# Altium PCB Candunio.PcbDoc (part 1 of 2)
Units mm, origin at the board's own origin, x right, y up, seen from the top; angles counter-clockwise.
Board outline 46 x 46 mm, 2 copper layers (Top Layer, Bottom Layer); 50 components, 55 nets, 199 pads, 108 vias.
Unrouted connection lines stored in the file: 10.
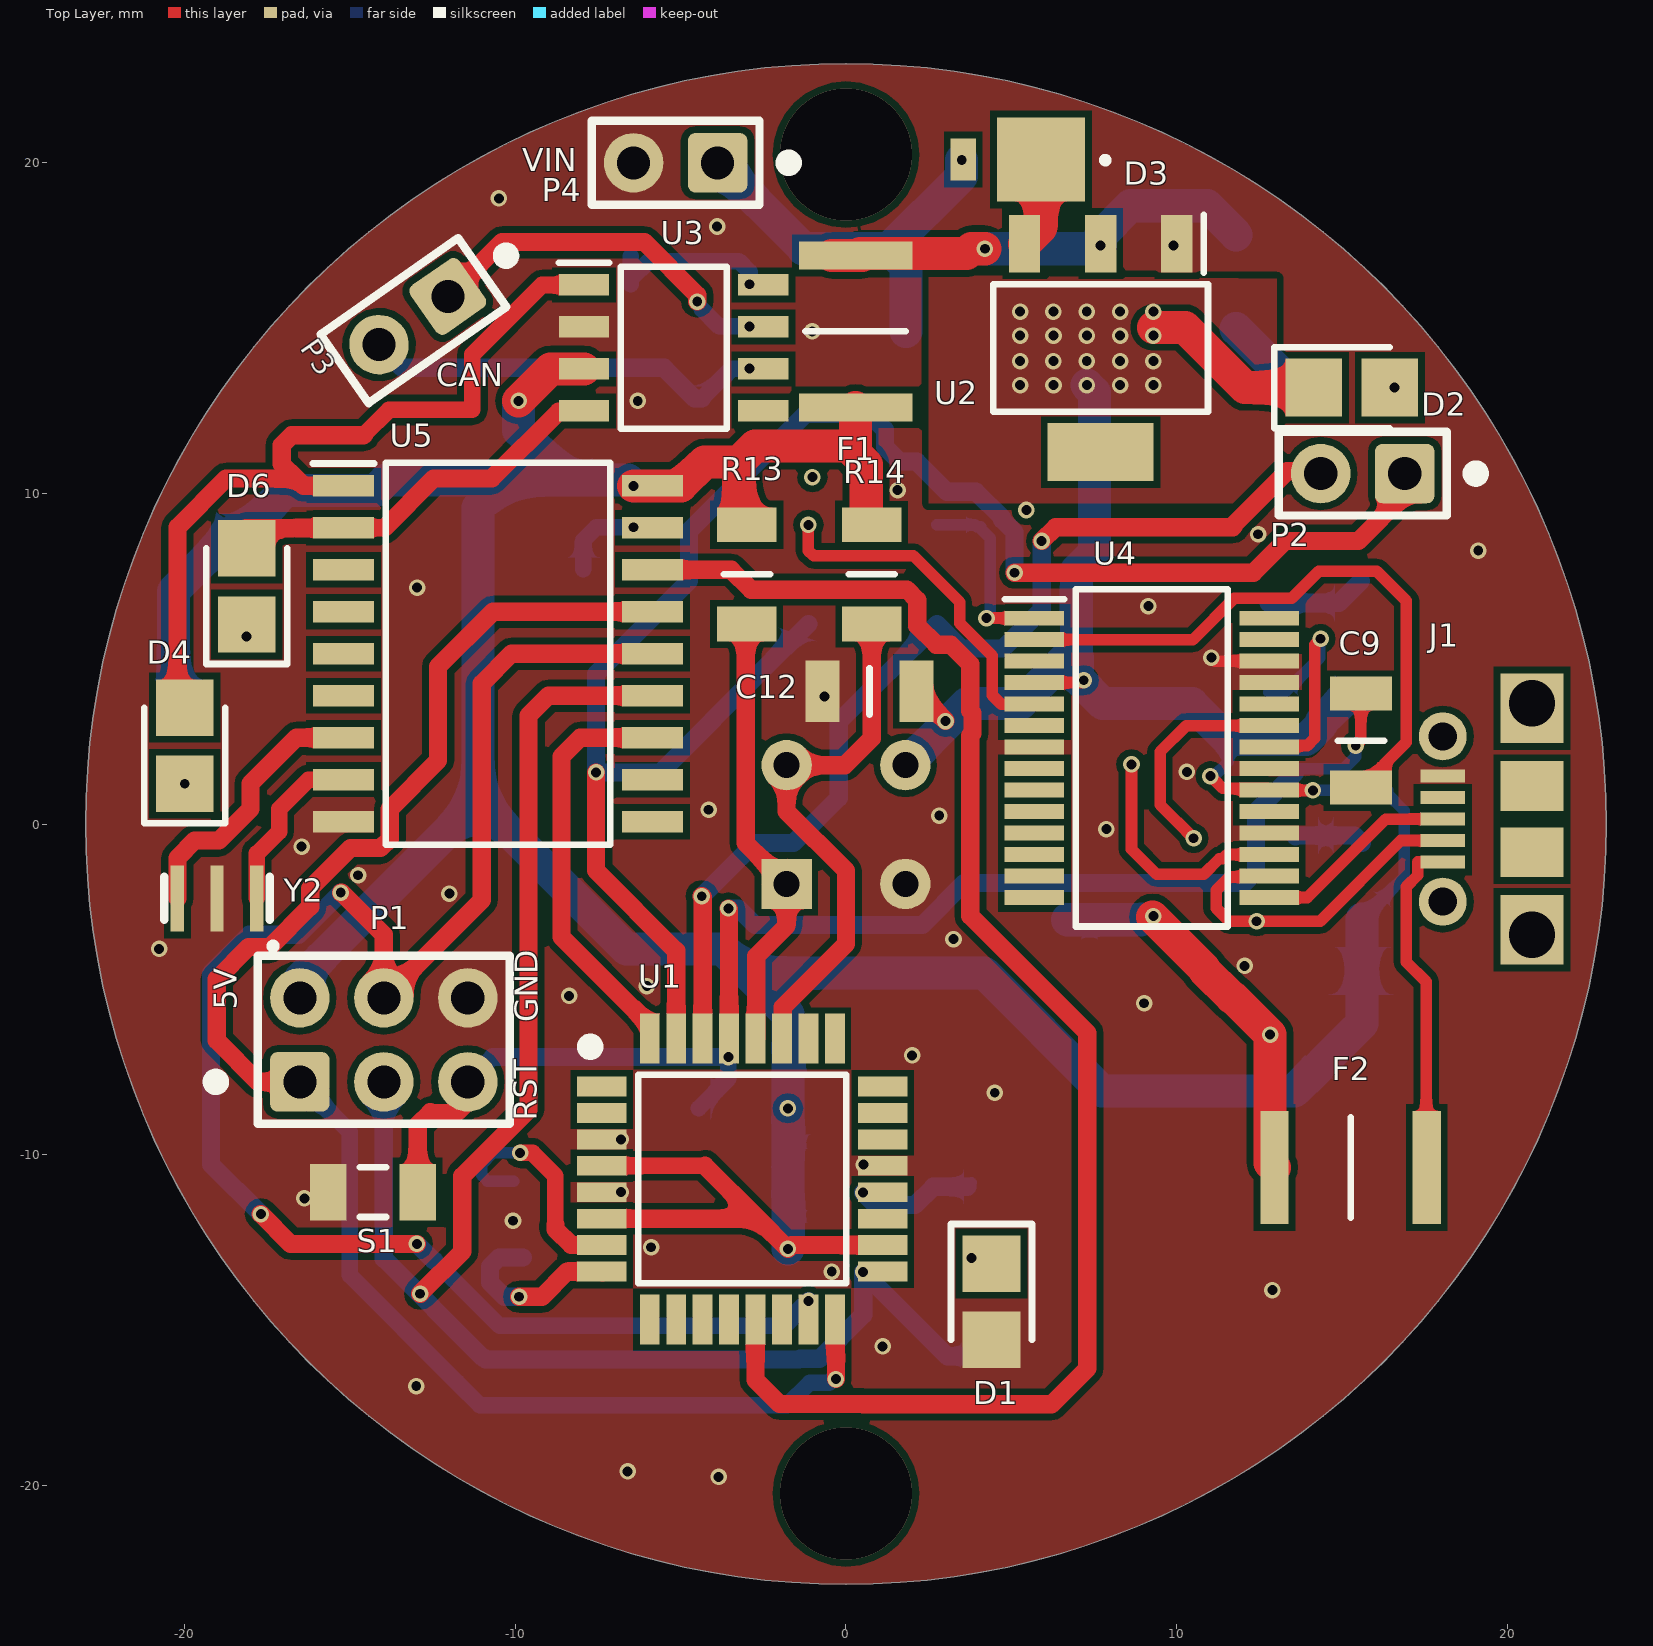
[diagram p0: Top Layer view]
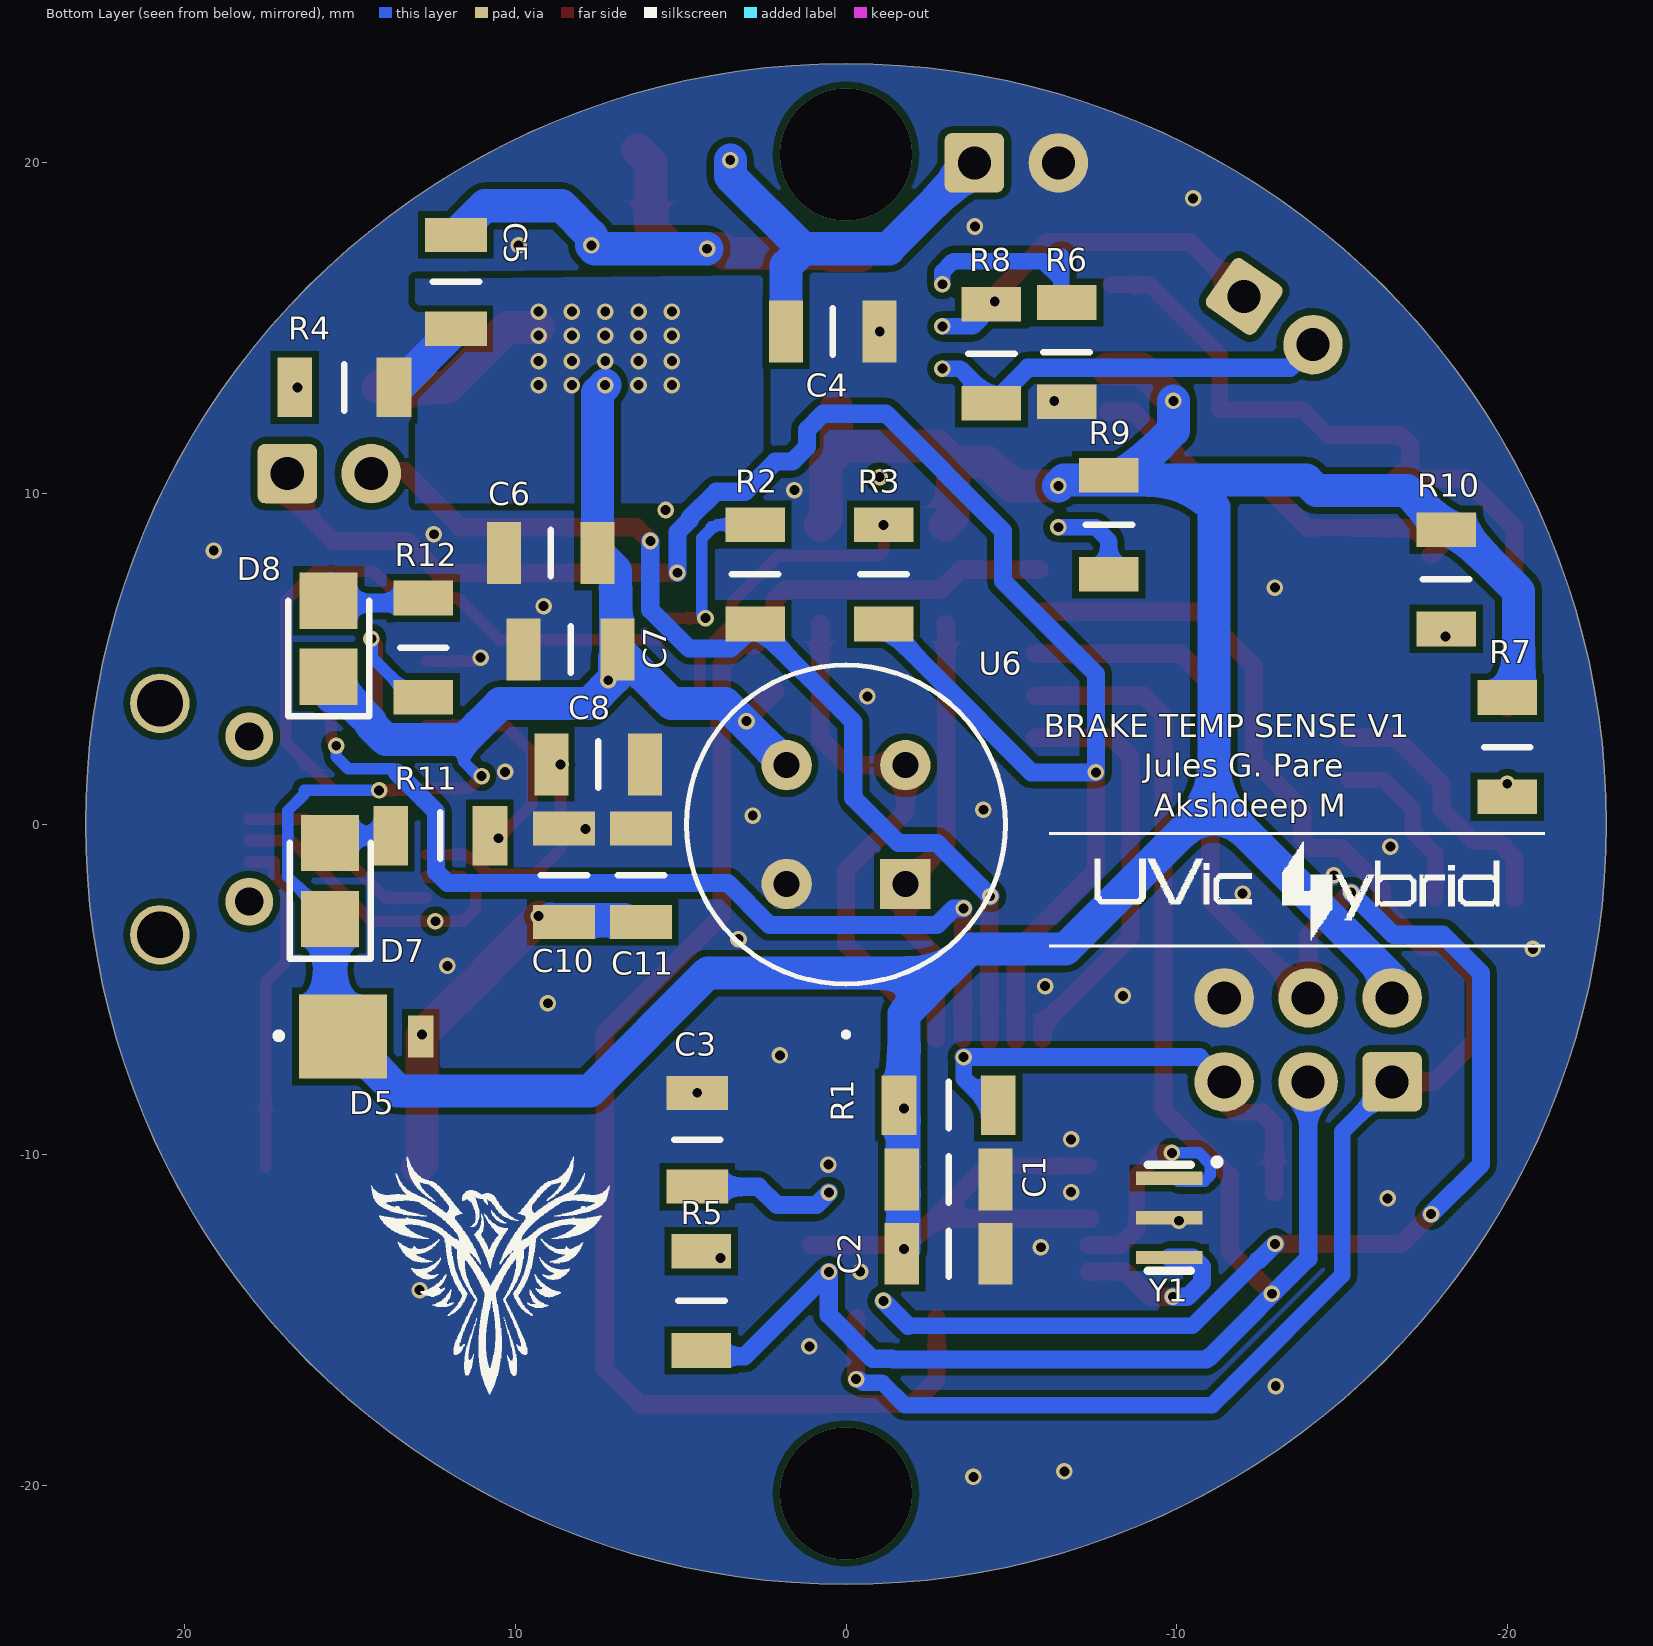
[diagram p1: Bottom Layer view, seen from below]

## Layer stack, top to bottom
Top Solder: solder mask 0.0102, Solder Resist, Dk 3.5
Top Layer: signal copper 0.0356
Dielectric 1: dielectric 0.32, FR-4, Dk 4.8
Bottom Layer: signal copper 0.0356
Bottom Solder: solder mask 0.0102, Solder Resist, Dk 3.5

## Board outline
-23,0 cw(c0,0) 0,23 cw(c0,0) 23,0 cw(c0,0) 0,-23 cw(c0,0) -23,0

## Design rules (kind name [scope] priority, off if disabled: settings)
Clearance [All] p1: gap=0.2 ignorepadtopadclearanceinfootprint=FALSE
MinimumSolderMaskSliver [All] p1: minsoldermaskwidth=0.07
PlaneConnect [All] p1: planeconnectstyle=Direct reliefexpansion=0.508 reliefentries=4 reliefconductorwidth=0.254 reliefairgap=0.254
PolygonConnect [All] p1: connectstyle=Direct reliefconductorwidth=0.254 reliefentries=4 polygonreliefangle="90 Angle" airgapwidth=0.254
RoutingVias [All] p1: holewidth=0.3 width=0.5 viastyle="Through Hole" minholewidth=0.3 minwidth=0.5 maxholewidth=0.3 maxwidth=0.5 viatemplateguid#1={90343F38-2971-4EF3-9687-2982C2C73AA6} viatemplatename#1=v50h30
SilkToSilkClearance [All] p1: silktosilkclearance=0.07
SilkToSolderMaskClearance [IsPad] p1: minsilkscreentomaskgap=0.07 clearancetoexposedcopper=TRUE
SolderMaskExpansion [All] p1: expansion=0
Width [All] p1: maxlimit=1 minlimit=0.35 preferedwidth=0.55
26 further rules are at their usual default settings.

## Classes and differential pairs
component class Candunio: C1 C2 C3 C4 C5 C6 C7 C8 C9 C10 C11 D1 D2 D3 D4 D5 D6 D7 D8 F1 F2 J1 P1 P2 P3 P4 R1 R2 R3 R4 R5 R6 R7 R8 R9 R10 R11 R12 S1 U1 U2 U3 U4 U5 Y1 Y2
component class BrakeTemp: C12 R13 R14 U6 U?

## Components (designator, comment, footprint, x,y, rotation, side; value= is the part's Value field where it differs from the comment)
C1 "Cap Pol3" CAPC3216X170N -3.106,-10.75 r180 bottom value=4.7uF
C2 "1uF" CAPC3216X170N -3.106,-13 r180 bottom
C3 "Cap Semi" CAPC3216X170N 4.5,-9.55 r90 bottom value=100nF
C4 "Cap Pol3" CAPC3216X170N 0.4,14.9 r180 bottom value=4.7uF
C5 "1uF" CAPC3216X170N 11.8,16.4 r90 bottom
C6 "Cap Pol3" CAPC3216X170N 8.931,8.2 r0 bottom value=4.7uF
C7 "Cap Semi" CAPC3216X170N 8.331,5.275 r0 bottom value=100nF
C8 "Cap Semi" CAPC3216X170N 7.493,1.803 r180 bottom value=100nF
C9 "Cap Semi" CAPC3216X170N 15.575,2.523 r270 top value=100nF
C10 "Cap Pol3" CAPC3216X170N 8.525,-1.55 r90 bottom value=4.7uF
C11 "1uF" CAPC3216X170N 6.198,-1.549 r90 bottom
C12 "0.1uF" CAPC3216X170N 0.711,4.013 r0 top
D1 "Red" LEDC3216X120NRED 4.4,-14.45 r270 top
D2 "Green" LEDC3216X120NGRN 15.3,13.2 r0 top
D3 "Diode" DO-220AA 5.2,20.1 r180 top
D4 "Yellow" LEDC3216X120NYEL -20,2.367 r90 top
D5 "Diode" DO-220AA 14.516,-6.426 r180 bottom
D6 "Yellow" LEDC3216X120NYEL -18.128,7.188 r90 top
D7 "Yellow" LEDC3216X120NYEL 15.605,-1.725 r90 bottom
D8 "Yellow" LEDC3216X120NYEL 15.65,5.604 r90 bottom
F1 "Fuse 1" FUSC4632X85N 0.29,14.9 r270 top
F2 "Fuse 2" FUSC4632X85N 15.265,-10.389 r0 top
J1 "USB micro B" 1050170001 20.75,0.15 r90 top
P1 "ICSP" "Pin Header 2x3 TH Pitch 2.54mm" -16.521,-5.26 r0 top
P2 "Serial" "Pin Header 1x2 TH Pitch 2.54mm" 16.9,10.6 r180 top
P3 "CANOUT" "Pin Header 1x2 TH Pitch 2.54mm" -12.044,15.957 r215 top
P4 "POWER" "Pin Header 1x2 TH Pitch 2.54mm" -3.885,20 r180 top
R1 "10K" RESC3216X60N -3.106,-8.5 r180 bottom
R2 "1K" RESC3216X60N 2.75,7.549 r90 bottom
R3 "1K" RESC3216X60N -1.137,7.549 r90 bottom
R4 "1K" RESC3216X60N 15.175,13.205 r180 bottom
R5 "1K" RESC3216X60N 4.375,-14.425 r270 bottom
R6 "16.9K" RESC3216X60N -6.675,14.275 r90 bottom
R7 "1K" RESC3216X60N -20,2.325 r270 bottom
R8 "120" RESC3216X60N -4.4,14.225 r270 bottom
R9 "10K" RESC3216X60N -7.95,9.05 r90 bottom
R10 "1K" RESC3216X60N -18.153,7.4 r90 bottom
R11 "1K" RESC3216X60N 12.27,-0.35 r0 bottom
R12 "1K" RESC3216X60N 12.787,5.333 r90 bottom
R13 "10K" RESC3216X60N -3,7.549 r90 top
R14 "10K" RESC3216X60N 0.78,7.549 r90 top
S1 "SW-PB" C1206 -14.306,-11.138 r180 top
U1 "ATmega328P-AU" QFP80P900X900X120-32N -3.137,-10.738 r0 top
U2 "LM1117IMPX-5.0" SOT230P700X180-4N 7.7,14.4 r270 top
U3 "MCP2551-E/SN" SOIC127P600X175-8N -5.213,14.4 r0 top
U4 "FT232RL-Reel" SOP65P780X200-28N 9.25,2 r0 top
U5 "MCP2515-E/ST" SOIC127P1030X265-18N -10.525,5.15 r0 top
U6 "MLX90614" H_08_1 0,2.523 r180 bottom value=Value
Y1 "CSTCE16M0V53-R0" CSTCE_G -9.779,-11.913 r90 bottom
Y2 "CSTCE16M0V53-R0" CSTCE_G -19.025,-2.25 r0 top

## Footprints (in the part's own frame and the unit in brackets; to place one, negate y for a bottom-side part, rotate by r counter-clockwise, add the part's x,y. Pads: shape width x height; smd on the part's side, far side on the other; paste and mask are expansions set on the pad)
1050170001 [mm] "CONN USB MICRO MOLEX MODIFIED FOR DRILL HITS"
  round 1.8 hole 1.4: 0(-3.5,0) 0(3.5,0)
  rect 2.1x1.9 smd: 0(-3.35,0) 0(3.35,0)
  round 1.45 hole 0.85: 0(-2.5,2.7) 0(2.5,2.7)
  rect 1.5x1.9 smd: 0(-1,0) 0(1,0)
  rect 0.4x1.35 smd: 1(-1.3,2.7) 2(-0.65,2.7) 3(0,2.7) 4(0.65,2.7) 5(1.3,2.7)
  body extent -4.1,-2.5 4.1,2.9, height 2.78
C1206 [mm] "Chip Capacitor, Body 3.2x1.6mm, IPC High Density"
  rect 1.1x1.7 smd: 1(-1.35,0) 2(1.35,0)
  silkscreen extent -0.4,-0.75 0.4,0.75, body extent -1.7,-0.9 1.7,0.9, height 1.3
CAPC3216X170N [mm]
  rect 1.03x1.87 smd: 1(-1.42,0) 2(1.42,0)
  silkscreen extent 0,-0.7 0,0.7, body extent -1.6,-0.8 1.6,0.8, height 1.7
CSTCE_G [mm]
  rect 0.4x2 smd: 1(1.2,0) 2(0,0) 3(-1.2,0)
  silkscreen extent -1.6,-1.52 1.77,0.65, body extent -1.6,-0.65 1.6,0.65, height 0.7
DO-220AA [mil]
  rect 105.12x100 smd: 1(-27.5,0)
  rect 30x50 smd: 2(65.06,0)
  silkscreen extent -107,-2 -102,3, body extent -76,-40 76,40, height 39
FUSC4632X85N [mm]
  rect 0.85x3.43 smd: 1(-2.3,0) 2(2.3,0)
  silkscreen extent 0,-1.52 0,1.52, body extent -2.27,-1.62 2.28,1.62, height 0.85
H_08_1 [mil]
  rect 60x60 / inner round 60 / far side rect 60x60 hole 31 paste+0 mask+0: 1(70.71,-170.71)
  round 60 hole 31 paste+0 mask+0: 2(70.71,-29.29) 3(-70.71,-29.29) 4(-70.71,-170.71)
  silkscreen extent -190,-353 190,90, body extent -182,-311 182,83, height 159
LEDC3216X120NGRN [mm]
  rect 1.7x1.75 smd: 1(-1.15,0) 2(1.15,0)
  silkscreen extent -2.35,-1.22 1.15,1.22, body extent -1.6,-0.8 1.6,0.8, height 1.1
LEDC3216X120NRED [mm]
  rect 1.7x1.75 smd: 1(-1.15,0) 2(1.15,0)
  silkscreen extent -2.35,-1.22 1.15,1.22, body extent -1.6,-0.8 1.6,0.8, height 1.1
LEDC3216X120NYEL [mm]
  rect 1.7x1.75 smd: 1(-1.15,0) 2(1.15,0)
  silkscreen extent -2.35,-1.22 1.15,1.22, body extent -1.6,-0.8 1.6,0.8, height 1.1
"Pin Header 1x2 TH Pitch 2.54mm" [mm] "PinHeader 1x2 TH Pitch 2.54mm"
  rrect25% 1.8x1.8 hole 1: 1(0,0)
  round 1.8 hole 1: 2(2.54,0)
  silkscreen extent -2.3,-1.27 3.81,1.27, body extent -1.27,-1.27 3.81,1.27, height 9.5
"Pin Header 2x3 TH Pitch 2.54mm" [mm] "PinHeader 1x3 TH Pitch 2.54mm"
  rrect25% 1.8x1.8 hole 1: 1(0,-2.54)
  round 1.8 hole 1: 2(2.54,-2.54) 3(5.08,-2.54) 4(0,0) 5(2.54,0) 6(5.08,0)
  silkscreen extent -2.69,-3.81 6.35,1.27, body extent -1.27,-3.81 6.35,1.27, height 9.5
QFP80P900X900X120-32N [mm]
  rect 1.5x0.6 smd: 1(-4.25,2.8) 2(-4.25,2) 3(-4.25,1.2) 4(-4.25,0.4) 5(-4.25,-0.4) 6(-4.25,-1.2) 7(-4.25,-2) 8(-4.25,-2.8) 17(4.25,-2.8) 18(4.25,-2) 19(4.25,-1.2) 20(4.25,-0.4) 21(4.25,0.4) 22(4.25,1.2) 23(4.25,2) 24(4.25,2.8)
  rect 0.6x1.5 smd: 9(-2.8,-4.25) 10(-2,-4.25) 11(-1.2,-4.25) 12(-0.4,-4.25) 13(0.4,-4.25) 14(1.2,-4.25) 15(2,-4.25) 16(2.8,-4.25) 25(2.8,4.25) 26(2,4.25) 27(1.2,4.25) 28(0.4,4.25) 29(-0.4,4.25) 30(-1.2,4.25) 31(-2,4.25) 32(-2.8,4.25)
  silkscreen extent -4.8,-3.15 3.15,4.2, body extent -4.5,-4.5 4.5,4.5, height 1.2
RESC3216X60N [mm]
  rect 1.05x1.8 smd: 1(-1.5,0) 2(1.5,0)
  silkscreen extent 0,-0.7 0,0.7, body extent -1.57,-0.83 1.58,0.77, height 1.2
SOIC127P600X175-8N [mm]
  rect 1.525x0.65 smd: 1(-2.712,1.905) 2(-2.712,0.635) 3(-2.712,-0.635) 4(-2.712,-1.905) 5(2.712,-1.905) 6(2.712,-0.635) 7(2.712,0.635) 8(2.712,1.905)
  silkscreen extent -3.47,-2.45 1.6,2.58, body extent -3,-2.45 3,2.45, height 1.75
SOIC127P1030X265-18N [mm]
  rect 1.85x0.65 smd: 1(-4.675,5.08) 2(-4.675,3.81) 3(-4.675,2.54) 4(-4.675,1.27) 5(-4.675,0) 6(-4.675,-1.27) 7(-4.675,-2.54) 8(-4.675,-3.81) 9(-4.675,-5.08) 10(4.675,-5.08) 11(4.675,-3.81) 12(4.675,-2.54) 13(4.675,-1.27) 14(4.675,0) 15(4.675,1.27) 16(4.675,2.54) 17(4.675,3.81) 18(4.675,5.08)
  silkscreen extent -5.6,-5.77 3.4,5.77, body extent -5.15,-5.77 5.15,5.78, height 2.65
SOP65P780X200-28N [mm]
  rect 1.8x0.45 smd: 1(-3.55,4.225) 2(-3.55,3.575) 3(-3.55,2.925) 4(-3.55,2.275) 5(-3.55,1.625) 6(-3.55,0.975) 7(-3.55,0.325) 8(-3.55,-0.325) 9(-3.55,-0.975) 10(-3.55,-1.625) 11(-3.55,-2.275) 12(-3.55,-2.925) 13(-3.55,-3.575) 14(-3.55,-4.225) 15(3.55,-4.225) 16(3.55,-3.575) 17(3.55,-2.925) 18(3.55,-2.275) 19(3.55,-1.625) 20(3.55,-0.975) 21(3.55,-0.325) 22(3.55,0.325) 23(3.55,0.975) 24(3.55,1.625) 25(3.55,2.275) 26(3.55,2.925) 27(3.55,3.575) 28(3.55,4.225)
  silkscreen extent -4.45,-5.1 2.3,5.1, body extent -3.9,-5.1 3.9,5.1, height 2
SOT230P700X180-4N [mm]
  rect 1.75x0.95 smd: 1(-3.15,2.3) 2(-3.15,0) 3(-3.15,-2.3)
  rect 1.75x3.2 smd: 4(3.15,0)
  silkscreen extent -4.03,-3.25 1.92,3.25, body extent -3.64,-3.35 3.65,3.35, height 1.81

## Part data
C1 C4 C6 C10: "Polarized Capacitor (Surface Mount)", Capacitance=4.7uF, Case/Package=1206, Case Code (Metric)=3216, Dielectric=X7R, Manufacturer="Kyocera AVX", Manufacturer Part Number=12063C475KAT2A, Max Operating Temperature=125°C, Min Operating Temperature=-55°C, Package Quantity=1, Supplier Part Number=1276-1055-1-ND, Tolerance=10%, Voltage=25V, Case Code (Imperial)=1206, ComponentLink1Description=https://datasheet.ciiva.com/2988/cx7r-2988115.pdf, ComponentLink1URL=https://datasheet.ciiva.com/2988/cx7r-2988115.pdf, ComponentLink2Description=https://datasheet.ciiva.com/7833/84526-7833366.pdf, ComponentLink2URL=https://datasheet.ciiva.com/7833/84526-7833366.pdf, ComponentLink3Description=https://datasheet.ciiva.com/16315/cx7r-16315830.pdf, ComponentLink3URL=https://datasheet.ciiva.com/16315/cx7r-16315830.pdf, ComponentLink4Description=https://datasheet.ciiva.com/153/cx7r-153207.pdf, ComponentLink4URL=https://datasheet.ciiva.com/153/cx7r-153207.pdf, ComponentLink5Description=https://datasheet.ciiva.com/7833/84526-7833367.pdf, ComponentLink5URL=https://datasheet.ciiva.com/7833/84526-7833367.pdf, ComponentLink6Description=https://datasheet.ciiva.com/153/cx7r-153208.pdf, ComponentLink6URL=https://datasheet.ciiva.com/153/cx7r-153208.pdf, ComponentLink7Description=https://datasheet.ciiva.com/7833/cx7r-7833368.pdf, ComponentLink7URL=https://datasheet.ciiva.com/7833/cx7r-7833368.pdf, ComponentLink8Description=https://datasheet.ciiva.com/153/cx7r-153209.pdf, ComponentLink8URL=https://datasheet.ciiva.com/153/cx7r-153209.pdf, ComponentLink9Description=https://datasheet.ciiva.com/5417/cx7r-218113-5417949.pdf, ComponentLink9URL=https://datasheet.ciiva.com/5417/cx7r-218113-5417949.pdf, ComponentLink10Description=https://datasheet.ciiva.com/28611/cx7r-28611725.pdf, ComponentLink10URL=https://datasheet.ciiva.com/28611/cx7r-28611725.pdf, ComponentLink11Description=https://datasheet.ciiva.com/11786/0900766b80dc2409-11786382.pdf, ComponentLink11URL=https://datasheet.ciiva.com/11786/0900766b80dc2409-11786382.pdf, Contact Plating=Tin,Matte, Depth=1.6mm, Height=1.78mm, LatestRevisionDate=29-May-2009, LatestRevisionNote="IPC-7351 Footprint Added.", Lead Free="Lead Free", Length=3.2mm, Mount="Surface Mount", Number of Pins=2, PackageDescription="Chip Capacitor", PackageReference=C0805, Packaging="Tape and Reel", Pricing 1="1=0.5, 10=0.345, 100=0.207, 500=0.15526, 1000=0.1311 (USD)", Published=8-Jun-2000, Publisher="Altium Limited", Radiation Hardening=No, REACH SVHC="No SVHC", Stock 1=0, Supplier 1=Digi-Key, Supplier 2=Digi-Key, Termination=SMD/SMT, Thickness=0.07inch, Voltage Rating=25V, Voltage Rating (DC)=25V, Width=0.063inch
C2 C5 C11: library part "Cap Semi", "Capacitor (Semiconductor SIM Model)", Case/Package=1206, Case Code (Metric)=3216, Dielectric=X7R, Manufacturer=Murata, Manufacturer Part Number=GRM31MR71H105KA88L, Max Operating Temperature=125°C, Min Operating Temperature=-55°C, Package Quantity=1, Supplier Part Number=1276-3086-1-ND, Tolerance=10%, Voltage=50V, Capacitance=1uF, Case Code (Imperial)=1206, ComponentLink1Description=https://datasheet.ciiva.com/16379/product-16379616.pdf, ComponentLink1URL=https://datasheet.ciiva.com/16379/product-16379616.pdf, ComponentLink2Description=https://datasheet.ciiva.com/14116/nmgrm-data-en-14116709.pdf, ComponentLink2URL=https://datasheet.ciiva.com/14116/nmgrm-data-en-14116709.pdf, ComponentLink3Description=https://datasheet.ciiva.com/22703/608985-22703384.pdf, ComponentLink3URL=https://datasheet.ciiva.com/22703/608985-22703384.pdf, ComponentLink4Description=https://datasheet.ciiva.com/3777/42grm31mr71h105ka8823-3777081.pdf, ComponentLink4URL=https://datasheet.ciiva.com/3777/42grm31mr71h105ka8823-3777081.pdf, ComponentLink5Description=https://datasheet.ciiva.com/6270/partnumbering-e-01-6270398.pdf, ComponentLink5URL=https://datasheet.ciiva.com/6270/partnumbering-e-01-6270398.pdf, ComponentLink6Description=https://datasheet.ciiva.com/6270/partnumbering-e-01-6270399.pdf, ComponentLink6URL=https://datasheet.ciiva.com/6270/partnumbering-e-01-6270399.pdf, ComponentLink7Description=https://datasheet.ciiva.com/29199/455056-da-01-en-vs-kondensator-1206-29199449.pdf, ComponentLink7URL=https://datasheet.ciiva.com/29199/455056-da-01-en-vs-kondensator-1206-29199449.pdf, ComponentLink8Description=https://datasheet.ciiva.com/29202/450923-da-01-de-vs-chip-kond-1206-1-0-uf-10pr-50-0v-x7r-29202718.pdf, ComponentLink8URL=https://datasheet.ciiva.com/29202/450923-da-01-de-vs-chip-kond-1206-1-0-uf-10pr-50-0v-x7r-29202718.pdf, Depth=1.6mm, Height=1.15mm, LatestRevisionDate=29-May-2009, LatestRevisionNote="IPC-7351 Footprint Added.", Lead Free="Lead Free", Length=3.2mm, Material=Ceramic, Mount="Surface Mount", Number of Pins=2, PackageDescription="Chip Capacitor", PackageReference=C1206, Packaging="Tape and Reel", Published=8-Jun-2000, Publisher="Altium Limited", REACH SVHC="No SVHC", Stock 1=0, Supplier 1=Digi-Key, Supplier 2=Digi-Key, Termination=SMD/SMT, Thickness=0.049inch, Voltage Rating=50V, Voltage Rating (DC)=50V, Width=0.063inch
C3 C7 C8 C9: "Capacitor (Semiconductor SIM Model)", Capacitance=100nF, Case/Package=1206, Case Code (Metric)=3216, Dielectric=X7R, Dielectric Material=Ceramic, Manufacturer=Yageo, Manufacturer Part Number=CC1206KKX7R0BB104, Max Operating Temperature=125°C, Min Operating Temperature=-55°C, Package Quantity=1, Supplier Part Number=1276-1151-1-ND, Tolerance=10%, Voltage=63V, Voltage Rating=100V, Case Code (Imperial)=1206, ComponentLink1Description=https://datasheet.ciiva.com/180/mlccorderingcode-180144.pdf, ComponentLink1URL=https://datasheet.ciiva.com/180/mlccorderingcode-180144.pdf, ComponentLink2Description=https://datasheet.ciiva.com/180/mlccorderingcode-180145.pdf, ComponentLink2URL=https://datasheet.ciiva.com/180/mlccorderingcode-180145.pdf, ComponentLink3Description=https://datasheet.ciiva.com/180/mlccorderingcode-180146.pdf, ComponentLink3URL=https://datasheet.ciiva.com/180/mlccorderingcode-180146.pdf, ComponentLink4Description=https://datasheet.ciiva.com/7978/1447671-7978227.pdf, ComponentLink4URL=https://datasheet.ciiva.com/7978/1447671-7978227.pdf, ComponentLink5Description=https://datasheet.ciiva.com/5425/upy-gp-np0-16v-to-50v-8-5425573.pdf, ComponentLink5URL=https://datasheet.ciiva.com/5425/upy-gp-np0-16v-to-50v-8-5425573.pdf, ComponentLink6Description=https://datasheet.ciiva.com/26829/getdatasheetpartid-403790-26829655.pdf, ComponentLink6URL=https://datasheet.ciiva.com/26829/getdatasheetpartid-403790-26829655.pdf, ComponentLink7Description=https://datasheet.ciiva.com/46391/1919308-46391993.pdf, ComponentLink7URL=https://datasheet.ciiva.com/46391/1919308-46391993.pdf, ComponentLink8Description=https://datasheet.ciiva.com/16981/upy-np0x7r-mv-100-to-630v-9-16981180.pdf, ComponentLink8URL=https://datasheet.ciiva.com/16981/upy-np0x7r-mv-100-to-630v-9-16981180.pdf, Composition=Ceramic, Depth=1.6mm, Height=1.25mm, LatestRevisionDate=29-May-2009, LatestRevisionNote="IPC-7351 Footprint Added.", Lead Free="Lead Free", Length=3.2mm, Mount="Surface Mount", Number of Pins=2, PackageDescription="Chip Capacitor", PackageReference=C1206, Packaging="Tape and Reel", Pricing 1="1=0.32, 10=0.221, 100=0.1117, 500=0.07646, 1000=0.06763 (USD)", Published=8-Jun-2000, Publisher="Altium Limited", Radiation Hardening=No, REACH SVHC="No SVHC", Stock 1=0, Supplier 1=Digi-Key, Supplier 2=Digi-Key, Termination=SMD/SMT, Thickness=0.057inch, Voltage Rating (DC)=100V, Width=0.063inch
C12: library part "Cap Semi_1", "Capacitor (Semiconductor SIM Model)", Case/Package=1206, Case Code (Metric)=3216, Dielectric=X7R, Manufacturer=Murata, Manufacturer Part Number=GRM31MR71H105KA88L, Max Operating Temperature=125°C, Min Operating Temperature=-55°C, Package Quantity=1, Supplier Part Number=1276-2744-1-ND, Tolerance=10%, Voltage=50V, Capacitance=0.1uF, Case Code (Imperial)=1206, ComponentLink1Description=https://datasheet.ciiva.com/16379/product-16379616.pdf, ComponentLink1URL=https://datasheet.ciiva.com/16379/product-16379616.pdf, ComponentLink2Description=https://datasheet.ciiva.com/14116/nmgrm-data-en-14116709.pdf, ComponentLink2URL=https://datasheet.ciiva.com/14116/nmgrm-data-en-14116709.pdf, ComponentLink3Description=https://datasheet.ciiva.com/22703/608985-22703384.pdf, ComponentLink3URL=https://datasheet.ciiva.com/22703/608985-22703384.pdf, ComponentLink4Description=https://datasheet.ciiva.com/3777/42grm31mr71h105ka8823-3777081.pdf, ComponentLink4URL=https://datasheet.ciiva.com/3777/42grm31mr71h105ka8823-3777081.pdf, ComponentLink5Description=https://datasheet.ciiva.com/6270/partnumbering-e-01-6270398.pdf, ComponentLink5URL=https://datasheet.ciiva.com/6270/partnumbering-e-01-6270398.pdf, ComponentLink6Description=https://datasheet.ciiva.com/6270/partnumbering-e-01-6270399.pdf, ComponentLink6URL=https://datasheet.ciiva.com/6270/partnumbering-e-01-6270399.pdf, ComponentLink7Description=https://datasheet.ciiva.com/29199/455056-da-01-en-vs-kondensator-1206-29199449.pdf, ComponentLink7URL=https://datasheet.ciiva.com/29199/455056-da-01-en-vs-kondensator-1206-29199449.pdf, ComponentLink8Description=https://datasheet.ciiva.com/29202/450923-da-01-de-vs-chip-kond-1206-1-0-uf-10pr-50-0v-x7r-29202718.pdf, ComponentLink8URL=https://datasheet.ciiva.com/29202/450923-da-01-de-vs-chip-kond-1206-1-0-uf-10pr-50-0v-x7r-29202718.pdf, Depth=1.6mm, Height=1.15mm, LatestRevisionDate=29-May-2009, LatestRevisionNote="IPC-7351 Footprint Added.", Lead Free="Lead Free", Length=3.2mm, Material=Ceramic, Mount="Surface Mount", Number of Pins=2, PackageDescription="Chip Capacitor", PackageReference=C1206, Packaging="Tape and Reel", Published=8-Jun-2000, Publisher="Altium Limited", REACH SVHC="No SVHC", Stock 1=0, Supplier 1=Digi-Key, Supplier 2=Digi-Key, Termination=SMD/SMT, Thickness=0.049inch, Voltage Rating=50V, Voltage Rating (DC)=50V, Width=0.063inch
D1: library part LED2, "Typical RED, GREEN, YELLOW, AMBER GaAs LED", Case/Package=1206, Case Code (Metric)=3216, Colour=Yellow, Forward Current=20mA, Forward Voltage=2.1V, Lens Colour=White,Clear, Manufacturer="Broadcom Avago", Manufacturer Part Number=HSMY-C150, Max Operating Temperature=85°C, Max Power Dissipation=65mW, Min Operating Temperature=-40°C, Package Quantity=1, Reverse Voltage=5V, Supplier Part Number=732-4992-1-ND, Case Code (Imperial)=1206, ComponentLink1Description=https://datasheet.ciiva.com/15117/getdatasheetpartid-110528-15117488.pdf, ComponentLink1URL=https://datasheet.ciiva.com/15117/getdatasheetpartid-110528-15117488.pdf, ComponentLink2Description=https://datasheet.ciiva.com/11774/0900766b804a6539-11774578.pdf, ComponentLink2URL=https://datasheet.ciiva.com/11774/0900766b804a6539-11774578.pdf, ComponentLink3Description=https://datasheet.ciiva.com/19466/1557071-19466435.pdf, ComponentLink3URL=https://datasheet.ciiva.com/19466/1557071-19466435.pdf, ComponentLink4Description=https://datasheet.ciiva.com/14172/swseriehsmx-c150toc190-e-14172159.pdf, ComponentLink4URL=https://datasheet.ciiva.com/14172/swseriehsmx-c150toc190-e-14172159.pdf, ComponentLink5Description=https://datasheet.ciiva.com/29280/180507-da-01-en-chip-led-hsmy-c150-gelb-29280997.pdf, ComponentLink5URL=https://datasheet.ciiva.com/29280/180507-da-01-en-chip-led-hsmy-c150-gelb-29280997.pdf, ComponentLink6Description=https://datasheet.ciiva.com/11773/0900766b804a6539-11773956.pdf, ComponentLink6URL=https://datasheet.ciiva.com/11773/0900766b804a6539-11773956.pdf, ComponentLink7Description=https://datasheet.ciiva.com/15117/getdatasheetpartid-142358-15117749.pdf, ComponentLink7URL=https://datasheet.ciiva.com/15117/getdatasheetpartid-142358-15117749.pdf, ComponentLink8Description=https://datasheet.ciiva.com/46426/313031-46426533.pdf, ComponentLink8URL=https://datasheet.ciiva.com/46426/313031-46426533.pdf, ComponentLink9Description=https://datasheet.ciiva.com/14172/swseriehsmx-c150toc190-e-14172156.pdf, ComponentLink9URL=https://datasheet.ciiva.com/14172/swseriehsmx-c150toc190-e-14172156.pdf, ComponentLink10Description=https://datasheet.ciiva.com/29281/180509-da-01-en-chip-led-hsmh-c150-rot-29281009.pdf, ComponentLink10URL=https://datasheet.ciiva.com/29281/180509-da-01-en-chip-led-hsmh-c150-rot-29281009.pdf, Contact Plating=Gold, Depth=1.6mm, Dominant Wavelength=586nm, Height=1.1mm, Illumination Colour=Yellow, LatestRevisionDate=17-Jul-2002, LatestRevisionNote="Re-released for DXP Platform.", Lead Free="Lead Free", Length=3.2mm, Lens Style=Diffused,Colorless,Rectangular, Lens Transparency=Diffused, Luminous Intensity=8mcd, Mount="Surface Mount", Number of Elements=1, Number of LEDs=1, Number of Pins=2, PackageDescription="SM LED; 2 Flat Leads", PackageReference=3.2X1.6X1.1, PackageVersion=Feb-2002, Packaging="Tape and Reel", Power Dissipation=65mW, Power Rating=65mW, Published=8-Jun-2000, Publisher="Altium Limited", Radiation Hardening=No, REACH SVHC="No SVHC", Stock 1=0, Stock 2=0, Supplier 1=Digi-Key, Supplier 2=Digi-Key, Supplier 3=Digi-Key, Supplier 4=Digi-Key, Test Current=20mA, Viewing Angle=170°, Voltage Rating (DC)=2.1V, Wavelength=586nm, Width=1.6mm
D2: library part LED2, "Typical RED, GREEN, YELLOW, AMBER GaAs LED", Case/Package=1206, Case Code (Metric)=3216, Colour=Green,Yellow, Forward Current=20mA, Forward Voltage=2.2V, Lens Colour=White,Clear, Manufacturer="Broadcom Avago", Manufacturer Part Number=HSMG-C150, Max Operating Temperature=85°C, Max Power Dissipation=65mW, Min Operating Temperature=-30°C, Package Quantity=1, Reverse Voltage=5V, Supplier Part Number=732-4993-1-ND, Case Code (Imperial)=1206, ComponentLink1Description=https://datasheet.ciiva.com/11774/0900766b804a6539-11774272.pdf, ComponentLink1URL=https://datasheet.ciiva.com/11774/0900766b804a6539-11774272.pdf, ComponentLink2Description=https://datasheet.ciiva.com/14172/swseriehsmx-c150toc190-e-14172162.pdf, ComponentLink2URL=https://datasheet.ciiva.com/14172/swseriehsmx-c150toc190-e-14172162.pdf, ComponentLink3Description=https://datasheet.ciiva.com/46426/313031-46426517.pdf, ComponentLink3URL=https://datasheet.ciiva.com/46426/313031-46426517.pdf, ComponentLink4Description=https://datasheet.ciiva.com/15117/getdatasheetpartid-110366-15117482.pdf, ComponentLink4URL=https://datasheet.ciiva.com/15117/getdatasheetpartid-110366-15117482.pdf, ComponentLink5Description=https://datasheet.ciiva.com/19466/1556369-19466015.pdf, ComponentLink5URL=https://datasheet.ciiva.com/19466/1556369-19466015.pdf, ComponentLink6Description=https://datasheet.ciiva.com/29280/180668-da-01-en-chip-led-hsmg-c150-gelb-gruen-29280632.pdf, ComponentLink6URL=https://datasheet.ciiva.com/29280/180668-da-01-en-chip-led-hsmg-c150-gelb-gruen-29280632.pdf, Contact Plating=Gold, Depth=1.6mm, Dominant Wavelength=572nm, Height=1.1mm, Illumination Colour=Green, LatestRevisionDate=17-Jul-2002, LatestRevisionNote="Re-released for DXP Platform.", Length=3.2mm, Lens Style=Diffused,Colorless,Rectangular, Lens Transparency=Diffused, Luminous Intensity=15mcd, Mount="Surface Mount", Number of Elements=1, Number of LEDs=1, Number of Pins=2, PackageDescription="SM LED; 2 Flat Leads", PackageReference=3.2X1.6X1.1, PackageVersion=Feb-2002, Packaging="Tape and Reel", Power Dissipation=65mW, Power Rating=65mW, Published=8-Jun-2000, Publisher="Altium Limited", Radiation Hardening=No, REACH SVHC="No SVHC", Supplier 1=Digi-Key, Supplier 2=Digi-Key, Test Current=20mA, Viewing Angle=170°, Wavelength=572nm, Width=1.6mm
D3 D5: "Default Diode", Supplier Part Number=SS1P3L-M3/84AGICT-ND, Code_JEDEC=DO-214-AB, LatestRevisionDate=17-Jul-2002, LatestRevisionNote="Re-released for DXP Platform.", PackageDescription="DO-214-AB/SMC; 2 C-Bend Leads; Body 7.9 x 5.9 mm, inc. leads (LxW)", PackageReference=SMC, PackageVersion=Sep-1996, Published=8-Jun-2000, Publisher="Altium Limited", Supplier 1=Digi-Key, Supplier 2=Digi-Key
D4 D6 D7 D8: library part LED2, "Typical RED, GREEN, YELLOW, AMBER GaAs LED", Case/Package=1206, Case Code (Metric)=3216, Forward Current=20mA, Forward Voltage=2.1V, Lens Colour=White,Clear, Manufacturer="Broadcom Avago", Manufacturer Part Number=HSMY-C150, Max Operating Temperature=85°C, Max Power Dissipation=65mW, Min Operating Temperature=-40°C, Package Quantity=1, Reverse Voltage=5V, Supplier Part Number=732-4994-1-ND, Case Code (Imperial)=1206, Colour=Yellow, ComponentLink1Description=https://datasheet.ciiva.com/15117/getdatasheetpartid-110528-15117488.pdf, ComponentLink1URL=https://datasheet.ciiva.com/15117/getdatasheetpartid-110528-15117488.pdf, ComponentLink2Description=https://datasheet.ciiva.com/11774/0900766b804a6539-11774578.pdf, ComponentLink2URL=https://datasheet.ciiva.com/11774/0900766b804a6539-11774578.pdf, ComponentLink3Description=https://datasheet.ciiva.com/19466/1557071-19466435.pdf, ComponentLink3URL=https://datasheet.ciiva.com/19466/1557071-19466435.pdf, ComponentLink4Description=https://datasheet.ciiva.com/14172/swseriehsmx-c150toc190-e-14172159.pdf, ComponentLink4URL=https://datasheet.ciiva.com/14172/swseriehsmx-c150toc190-e-14172159.pdf, ComponentLink5Description=https://datasheet.ciiva.com/29280/180507-da-01-en-chip-led-hsmy-c150-gelb-29280997.pdf, ComponentLink5URL=https://datasheet.ciiva.com/29280/180507-da-01-en-chip-led-hsmy-c150-gelb-29280997.pdf, Contact Plating=Gold, Depth=1.6mm, Dominant Wavelength=586nm, Height=1.1mm, Illumination Colour=Yellow, LatestRevisionDate=17-Jul-2002, LatestRevisionNote="Re-released for DXP Platform.", Lead Free="Lead Free", Length=3.2mm, Lens Style=Diffused,Colorless,Rectangular, Lens Transparency=Diffused, Luminous Intensity=8mcd, Mount="Surface Mount", Number of Elements=1, Number of LEDs=1, Number of Pins=2, PackageDescription="SM LED; 2 Flat Leads", PackageReference=3.2X1.6X1.1, PackageVersion=Feb-2002, Packaging="Tape and Reel", Power Dissipation=65mW, Power Rating=65mW, Published=8-Jun-2000, Publisher="Altium Limited", Radiation Hardening=No, REACH SVHC="No SVHC", Stock 1=0, Supplier 1=Digi-Key, Supplier 2=Digi-Key, Test Current=20mA, Viewing Angle=170°, Voltage Rating (DC)=2.1V, Wavelength=586nm, Width=1.6mm
F1: library part "Fuse 2", "Fuse", Case/Package=1812, Case Code (Metric)=4532, Current Rating=100A, Hold Current=500mA, Manufacturer=Bourns, Manufacturer Part Number=MF-MSMF050-2, Max Operating Temperature=85°C, Min Operating Temperature=-40°C, Operating Supply Voltage=15V, Package Quantity=2000, Power Dissipation=800mW, Resistance=150mR, Supplier Part Number=?MF-MSMF050-2CT-ND, Trip Current=1A, Approvals=UL,CSA,TUV, Case Code (Imperial)=1812, ComponentLink1Description=https://datasheet.ciiva.com/326/mfmsmf-326354.pdf, ComponentLink1URL=https://datasheet.ciiva.com/326/mfmsmf-326354.pdf, ComponentLink2Description=https://datasheet.ciiva.com/1228/1786007-1228155.pdf, ComponentLink2URL=https://datasheet.ciiva.com/1228/1786007-1228155.pdf, ComponentLink3Description=https://datasheet.ciiva.com/16205/mfmsmf-16205994.pdf, ComponentLink3URL=https://datasheet.ciiva.com/16205/mfmsmf-16205994.pdf, ComponentLink4Description=https://datasheet.ciiva.com/34302/1164200-34302041.pdf, ComponentLink4URL=https://datasheet.ciiva.com/34302/1164200-34302041.pdf, ComponentLink5Description=https://datasheet.ciiva.com/14537/70153434-14537737.pdf, ComponentLink5URL=https://datasheet.ciiva.com/14537/70153434-14537737.pdf, ComponentLink6Description=https://datasheet.ciiva.com/46395/1695373-46395287.pdf, ComponentLink6URL=https://datasheet.ciiva.com/46395/1695373-46395287.pdf, ComponentLink7Description=https://datasheet.ciiva.com/22749/1695373-22749079.pdf, ComponentLink7URL=https://datasheet.ciiva.com/22749/1695373-22749079.pdf, ComponentLink8Description=https://datasheet.ciiva.com/32426/mf-msmf-series-eng-tds-32426126.pdf, ComponentLink8URL=https://datasheet.ciiva.com/32426/mf-msmf-series-eng-tds-32426126.pdf, ComponentLink9Description=https://datasheet.ciiva.com/4501/mfmsmf-72300-4501655.pdf, ComponentLink9URL=https://datasheet.ciiva.com/4501/mfmsmf-72300-4501655.pdf, ComponentLink10Description=https://datasheet.ciiva.com/3019/mfmsmf-3019622.pdf, ComponentLink10URL=https://datasheet.ciiva.com/3019/mfmsmf-3019622.pdf, ComponentLink11Description=https://datasheet.ciiva.com/3019/mfmsmf-3019621.pdf, ComponentLink11URL=https://datasheet.ciiva.com/3019/mfmsmf-3019621.pdf, ComponentLink12Description=https://datasheet.ciiva.com/326/mfmsmf-326356.pdf, ComponentLink12URL=https://datasheet.ciiva.com/326/mfmsmf-326356.pdf, ComponentLink13Description=https://datasheet.ciiva.com/1274/1786007-1274499.pdf, ComponentLink13URL=https://datasheet.ciiva.com/1274/1786007-1274499.pdf, ComponentLink14Description=https://datasheet.ciiva.com/326/mfmsmf-326355.pdf, ComponentLink14URL=https://datasheet.ciiva.com/326/mfmsmf-326355.pdf, ComponentLink15Description=https://datasheet.ciiva.com/1274/1786007-1274498.pdf, ComponentLink15URL=https://datasheet.ciiva.com/1274/1786007-1274498.pdf, ComponentLink16Description=https://datasheet.ciiva.com/15226/getdatasheetpartid-117168-15226886.pdf, ComponentLink16URL=https://datasheet.ciiva.com/15226/getdatasheetpartid-117168-15226886.pdf, ComponentLink17Description=https://datasheet.ciiva.com/25894/mfmsmf-25894175.pdf, ComponentLink17URL=https://datasheet.ciiva.com/25894/mfmsmf-25894175.pdf, Contact Plating=Gold, Height=0.85mm, LatestRevisionDate=17-Jul-2002, LatestRevisionNote="Re-released for DXP Platform.", Lead Free="Lead Free", Length=4.73mm, Max Current Rating=100A, Mount="Surface Mount,PCB", Number of Terminals=2, PackageDescription="Thru-Hole; 2 Leads", PackageReference=PIN-W2/E2.8, Packaging="Tape and Reel", Part number=MF-MSMF050-2, Pricing 1="2000=0.2898, 4000=0.28463, 6000=0.27945, 10000=0.2691 (USD)", Published=8-Jun-2000, Publisher="Altium Limited", Radiation Hardening=No, REACH SVHC="No SVHC", Stock 1=126000, Supplier 1=Digi-Key, Terminal Material=Gold, Termination=SMD/SMT, Time to Trip=0.15s, Voltage Rating=15V, Voltage Rating (DC)=15V, Width=3.41mm
F2: "Fuse", Case/Package=1812, Case Code (Metric)=4532, Current Rating=100A, Hold Current=500mA, Manufacturer=Bourns, Manufacturer Part Number=MF-MSMF050-2, Max Operating Temperature=85°C, Min Operating Temperature=-40°C, Operating Supply Voltage=15V, Package Quantity=2000, Power Dissipation=800mW, Resistance=150mR, Supplier Part Number=?MF-MSMF050-2CT-ND, Trip Current=1A, Approvals=UL,CSA,TUV, Case Code (Imperial)=1812, ComponentLink1Description=https://datasheet.ciiva.com/326/mfmsmf-326354.pdf, ComponentLink1URL=https://datasheet.ciiva.com/326/mfmsmf-326354.pdf, ComponentLink2Description=https://datasheet.ciiva.com/1228/1786007-1228155.pdf, ComponentLink2URL=https://datasheet.ciiva.com/1228/1786007-1228155.pdf, ComponentLink3Description=https://datasheet.ciiva.com/16205/mfmsmf-16205994.pdf, ComponentLink3URL=https://datasheet.ciiva.com/16205/mfmsmf-16205994.pdf, ComponentLink4Description=https://datasheet.ciiva.com/34302/1164200-34302041.pdf, ComponentLink4URL=https://datasheet.ciiva.com/34302/1164200-34302041.pdf, ComponentLink5Description=https://datasheet.ciiva.com/14537/70153434-14537737.pdf, ComponentLink5URL=https://datasheet.ciiva.com/14537/70153434-14537737.pdf, ComponentLink6Description=https://datasheet.ciiva.com/46395/1695373-46395287.pdf, ComponentLink6URL=https://datasheet.ciiva.com/46395/1695373-46395287.pdf, ComponentLink7Description=https://datasheet.ciiva.com/22749/1695373-22749079.pdf, ComponentLink7URL=https://datasheet.ciiva.com/22749/1695373-22749079.pdf, ComponentLink8Description=https://datasheet.ciiva.com/32426/mf-msmf-series-eng-tds-32426126.pdf, ComponentLink8URL=https://datasheet.ciiva.com/32426/mf-msmf-series-eng-tds-32426126.pdf, ComponentLink9Description=https://datasheet.ciiva.com/4501/mfmsmf-72300-4501655.pdf, ComponentLink9URL=https://datasheet.ciiva.com/4501/mfmsmf-72300-4501655.pdf, ComponentLink10Description=https://datasheet.ciiva.com/3019/mfmsmf-3019622.pdf, ComponentLink10URL=https://datasheet.ciiva.com/3019/mfmsmf-3019622.pdf, ComponentLink11Description=https://datasheet.ciiva.com/3019/mfmsmf-3019621.pdf, ComponentLink11URL=https://datasheet.ciiva.com/3019/mfmsmf-3019621.pdf, ComponentLink12Description=https://datasheet.ciiva.com/326/mfmsmf-326356.pdf, ComponentLink12URL=https://datasheet.ciiva.com/326/mfmsmf-326356.pdf, ComponentLink13Description=https://datasheet.ciiva.com/1274/1786007-1274499.pdf, ComponentLink13URL=https://datasheet.ciiva.com/1274/1786007-1274499.pdf, ComponentLink14Description=https://datasheet.ciiva.com/326/mfmsmf-326355.pdf, ComponentLink14URL=https://datasheet.ciiva.com/326/mfmsmf-326355.pdf, ComponentLink15Description=https://datasheet.ciiva.com/1274/1786007-1274498.pdf, ComponentLink15URL=https://datasheet.ciiva.com/1274/1786007-1274498.pdf, ComponentLink16Description=https://datasheet.ciiva.com/15226/getdatasheetpartid-117168-15226886.pdf, ComponentLink16URL=https://datasheet.ciiva.com/15226/getdatasheetpartid-117168-15226886.pdf, ComponentLink17Description=https://datasheet.ciiva.com/25894/mfmsmf-25894175.pdf, ComponentLink17URL=https://datasheet.ciiva.com/25894/mfmsmf-25894175.pdf, Contact Plating=Gold, Height=0.85mm, LatestRevisionDate=17-Jul-2002, LatestRevisionNote="Re-released for DXP Platform.", Lead Free="Lead Free", Length=4.73mm, Max Current Rating=100A, Mount="Surface Mount,PCB", Number of Terminals=2, PackageDescription="Thru-Hole; 2 Leads", PackageReference=PIN-W2/E2.8, Packaging="Tape and Reel", Part number=MF-MSMF050-2, Pricing 1="2000=0.2898, 4000=0.28463, 6000=0.27945, 10000=0.2691 (USD)", Published=8-Jun-2000, Publisher="Altium Limited", Radiation Hardening=No, REACH SVHC="No SVHC", Stock 1=126000, Supplier 1=Digi-Key, Terminal Material=Gold, Termination=SMD/SMT, Time to Trip=0.15s, Voltage Rating=15V, Voltage Rating (DC)=15V, Width=3.41mm
J1: library part 1050170001, "CONN SM TH USB MICRO MODIFIED FOR DRILL", Part number=WM1399CT-ND, Supplier Part Number=609-4618-1-ND, Details="Modified from reference footprint for standard drill hits (rather than slots)", Supplier 1=Digi-Key
P1: library part "Header 3X2A", "Header, 3-Pin, Dual row", LatestRevisionDate=17-Jul-2002, LatestRevisionNote="Re-released for DXP Platform.", Publisher="Altium Limited"
P2 P3 P4: library part "Header 2", "Header, 2-Pin", LatestRevisionDate=17-Jul-2002, LatestRevisionNote="Re-released for DXP Platform.", Publisher="Altium Limited"
R1: library part Res1, "Resistor", Case/Package=1206, Case Code (Metric)=3216, Manufacturer="Stackpole Electronics", Manufacturer Part Number=RNCP1206FTD1K00, Max Operating Temperature=155°C, Max Power Dissipation=500mW, Min Operating Temperature=-55°C, Resistance=10kR, Supplier Part Number=RNCP1206FTD10K0CT-ND, Temperature Coefficient=100ppm/°C, Tolerance=1%, Case Code (Imperial)=1206, ComponentLink1Description=http://www.seielect.com/Catalog/SEI-rncp.pdf, ComponentLink1URL=http://www.seielect.com/Catalog/SEI-rncp.pdf, ComponentLink2Description=https://www.seielect.com/catalog/SEI-Packaging.pdf, ComponentLink2URL=https://www.seielect.com/catalog/SEI-Packaging.pdf, Composition="Thin Film", Contact Plating=Nickel,Tin,Matte, Height=0.024inch, Lead Free="Lead Free", Length=0.122inch, Mount="Surface Mount", Number of Terminations=2, Packaging="Tape and Reel", Pricing 1="1=0.1, 10=0.052, 100=0.0211, 1000=0.00949, 2500=0.00824 (USD)", Radiation Hardening=No, Stock 1=679, Supplier 1=Digi-Key, Width=0.059inch
R2 R3 R4 R5 R7 R10 R11 R12: library part Res1, "Resistor", Case/Package=1206, Case Code (Metric)=3216, Manufacturer="Stackpole Electronics", Manufacturer Part Number=RNCP1206FTD1K00, Max Operating Temperature=155°C, Max Power Dissipation=500mW, Min Operating Temperature=-55°C, Resistance=1kR, Supplier Part Number=RMCF1206FT1K00CT-ND, Temperature Coefficient=100ppm/°C, Tolerance=1%, Case Code (Imperial)=1206, ComponentLink1Description=http://www.seielect.com/Catalog/SEI-rncp.pdf, ComponentLink1URL=http://www.seielect.com/Catalog/SEI-rncp.pdf, ComponentLink2Description=https://www.seielect.com/catalog/SEI-Packaging.pdf, ComponentLink2URL=https://www.seielect.com/catalog/SEI-Packaging.pdf, Composition="Thin Film", Contact Plating=Nickel,Tin,Matte, Height=0.024inch, Lead Free="Lead Free", Length=0.122inch, Mount="Surface Mount", Number of Terminations=2, Packaging="Tape and Reel", Pricing 1="1=0.1, 10=0.052, 100=0.0211, 1000=0.00949, 2500=0.00824 (USD)", Radiation Hardening=No, Stock 1=679, Supplier 1=Digi-Key, Width=0.059inch
R6: library part Res1, "Resistor", Case/Package=1206, Case Code (Metric)=3216, Manufacturer="TE Connectivity Holsworthy", Manufacturer Part Number=CRGH1206F16K9, Max Operating Temperature=125°C, Min Operating Temperature=-55°C, Number of Resistors=1, Power Rating=500mW, Resistance=16.9kR, Supplier Part Number=RMCF1206FT16K9CT-ND, Temperature Coefficient=100ppm/°C, Tolerance=1%, Voltage Rating=200V, Case Code (Imperial)=1206, ComponentLink1Description=https://datasheet.ciiva.com/12573/eng-ds-1773204-g-12573853.pdf, ComponentLink1URL=https://datasheet.ciiva.com/12573/eng-ds-1773204-g-12573853.pdf, Composition="Thick Film,Power resistor", ELV=Compliant, Height=0.55mm, Length=3.1mm, Mount="Surface Mount", Number of Terminations=2, Packaging="Tape and Reel", Supplier 1=Digi-Key, Termination=Solder, Width=1.55mm
R8: library part Res1, "Resistor", Case/Package=1206, Case Code (Metric)=3216, Manufacturer=Vishay, Manufacturer Part Number=CRCW1206120RFKEAHP, Max Operating Temperature=155°C, Min Operating Temperature=-55°C, Package Quantity=5000, Power Rating=500mW, Resistance=120R, Temperature Coefficient=100ppm/°C, Tolerance=1%, Voltage Rating=200V, Case Code (Imperial)=1206, ComponentLink1Description=https://datasheet.ciiva.com/8976/crcwhpe3-8976135.pdf, ComponentLink1URL=https://datasheet.ciiva.com/8976/crcwhpe3-8976135.pdf, ComponentLink2Description=https://datasheet.ciiva.com/48525/crcwhpe3-48525463.pdf, ComponentLink2URL=https://datasheet.ciiva.com/48525/crcwhpe3-48525463.pdf, ComponentLink3Description=https://datasheet.ciiva.com/7777/424479-7777433.pdf, ComponentLink3URL=https://datasheet.ciiva.com/7777/424479-7777433.pdf, ComponentLink4Description=https://datasheet.ciiva.com/7777/424479-7777434.pdf, ComponentLink4URL=https://datasheet.ciiva.com/7777/424479-7777434.pdf, Composition="Thick Film", Contact Plating=Tin, Depth=1.6mm, Height=0.5mm, Lead Free="Lead Free", Length=3.1mm, Military Standard=Not, Packaging="Tape and Reel", Radiation Hardening=No, REACH SVHC=Unknown, Stock 1=0, Supplier 1=Digi-Key, Supplier 2=Digi-Key, Termination=SMD/SMT, Voltage Rating (DC)=200V, Weight=0.000353oz, Width=1.6mm
R9 R13 R14: library part Res1, "Resistor", Case/Package=1206, Case Code (Metric)=3216, Manufacturer="Stackpole Electronics", Manufacturer Part Number=RNCP1206FTD10K0, Max Operating Temperature=155°C, Max Power Dissipation=500mW, Min Operating Temperature=-55°C, Resistance=10kR, Supplier Part Number=RNCP1206FTD10K0CT-ND, Temperature Coefficient=100ppm/°C, Tolerance=1%, Case Code (Imperial)=1206, ComponentLink1Description=http://www.seielect.com/Catalog/SEI-rncp.pdf, ComponentLink1URL=http://www.seielect.com/Catalog/SEI-rncp.pdf, Composition="Thin Film", Height=0.024inch, Length=0.122inch, Mount="Surface Mount", Number of Terminations=2, Packaging="Tape and Reel", Pricing 1="1=0.1, 10=0.052, 100=0.0211, 1000=0.00949, 2500=0.00824 (USD)", Stock 1=41487, Supplier 1=Digi-Key, Width=0.059inch
S1: "Switch", Manufacturer="ITT C&K", Manufacturer Part Number=KXT331LHS, Supplier Part Number=CKN10779CT-ND, ComponentLink1Description=https://www.ckswitches.com/media/1465/kxt3.pdf, ComponentLink1URL=https://www.ckswitches.com/media/1465/kxt3.pdf, ComponentLink2Description=http://www.ckswitches.com/media/1465/kxt3.pdf, ComponentLink2URL=http://www.ckswitches.com/media/1465/kxt3.pdf, LatestRevisionDate=17-Jul-2002, LatestRevisionNote="Re-released for DXP Platform.", PackageDescription="Switch; 2 Leads", PackageReference=SPST-2, Pricing 1="8500=0.1264 (USD)", Published=24-Mar-1999, Publisher="Altium Limited", Stock 1=42500, Supplier 1=Digi-Key
U1: "8-bit AVR Microcontroller, 32KB Flash, 1KB EEPROM, 2KB SRAM, 32-pin TQFP, Industrial Grade (-40°C to 85°C)", Supplier Part Number=ATMEGA328P-AU-ND, Code_JEDEC=MS-026-ABA, ComponentLink1Description="Manufacturer Link", ComponentLink1URL=http://www.atmel.com/products/avr/default.asp?, ComponentLink2Description="ATmega48A/48PA/88A/88PA/168A/168PA/328/328P Datasheet", ComponentLink2URL=http://www.atmel.com/dyn/resources/prod_documents/8271.pdf, ComponentLink3Description="ATmega48A/48PA/88A/88PA/168A/168PA/328/328P Summary", ComponentLink3URL=http://www.atmel.com/dyn/resources/prod_documents/8271S.pdf, ComponentLink4Description="Atmel.com Home", ComponentLink4URL=http://www.atmel.com, DatasheetVersion="revA, Jan-2010", PackageDescription="32-Lead, 7x7x1.0 mm Body, 0.8mm Lead Pitch, Thin Profile Plastic Quad Flat Package (TQFP)", PackageReference=32A, PackageVersion="revB, Oct-2001", Published=1-Apr-2010, Publisher="Altium Limited", Supplier 1=Digi-Key, Supplier 2=Farnell, Supplier 3=Mouser, Supplier Part Number 2=1715486, Supplier Part Number 3=556-ATMEGA328P-AU
U2: "800mA Low-Dropout Linear Regulator, 4-pin SOT-223", Manufacturer="National Semiconductor", PackageTopMarking=XYTT*N06B, PartNumber=LM1117IMPX-5.0/NOPBCT-ND, PowerWise=N, Supplier Part Number=296-21114-1-ND, Code_IPC=SOT223-4, Code_JEDEC=TO-261-AA, ComponentLink1Description="LM1117 Datasheet", ComponentLink1URL=http://www.national.com/ds/LM/LM1117.pdf, ComponentLink2Description="LM1117 Web Page", ComponentLink2URL=http://www.national.com/pf/LM/LM1117.html, ComponentLink3Description="MP04A Package Page", ComponentLink3URL=http://www.national.com/packaging/folders/mp04a.html, CompType="LDO IC", DatasheetVersion=Apr-2006, PackageDescription="Molded SOT-223, 6.50 x 3.56 x 1.6mm Body, 4 Lead, 2.3mm Pitch", PackageReference=MP04A, PackageVersion="revB, Apr-2003", PinCount=4, Published=1-Mar-2010, Publisher="Altium Limited", RoHS=N, Supplier 1=Digi-Key
U3: "SOIC", Supplier Part Number=MCP2551T-E/SNCT-ND, Supplier 1=Digi-Key
U4: "USB UART Asynchronous Serial Data Transfer Chip, SSOP-28, Tape and Reel", Case/Package=SSOP, Manufacturer=FTDI, Manufacturer Part Number=FT232RL-REEL, Max Operating Temperature=85°C, Max Supply Voltage=5.25V, Min Operating Temperature=-40°C, Min Supply Voltage=3.3V, Operating Supply Current=15mA, Package Quantity=2000, Supplier Part Number=768-1007-1-ND, Voltage=5V, ComponentLink1Description="Manufacturer Link", ComponentLink1URL=http://www.ftdichip.com/Products/ICs/FT232R.htm, ComponentLink2Description=Datasheet, ComponentLink2URL=http://www.ftdichip.com/Support/Documents/DataSheets/ICs/DS_FT232R.pdf, ComponentLink3Description=https://datasheet.ciiva.com/34304/2161019-34304054.pdf, ComponentLink3URL=https://datasheet.ciiva.com/34304/2161019-34304054.pdf, ComponentLink4Description=https://datasheet.ciiva.com/1787/ds-ft232r-1787047.pdf, ComponentLink4URL=https://datasheet.ciiva.com/1787/ds-ft232r-1787047.pdf, ComponentLink5Description=https://datasheet.ciiva.com/1787/ds-ft232r-1787048.pdf, ComponentLink5URL=https://datasheet.ciiva.com/1787/ds-ft232r-1787048.pdf, ComponentLink6Description=https://datasheet.ciiva.com/1787/ds-ft232r-1787049.pdf, ComponentLink6URL=https://datasheet.ciiva.com/1787/ds-ft232r-1787049.pdf, ComponentLink7Description=https://datasheet.ciiva.com/4787/ds-ft232r-11534-4787658.pdf, ComponentLink7URL=https://datasheet.ciiva.com/4787/ds-ft232r-11534-4787658.pdf, ComponentLink8Description=https://datasheet.ciiva.com/15150/getdatasheetpartid-643207-15150506.pdf, ComponentLink8URL=https://datasheet.ciiva.com/15150/getdatasheetpartid-643207-15150506.pdf, ComponentLink9Description=https://datasheet.ciiva.com/16200/ds-ft232r-16200652.pdf, ComponentLink9URL=https://datasheet.ciiva.com/16200/ds-ft232r-16200652.pdf, ComponentLink10Description=https://datasheet.ciiva.com/26841/ft232rl-reel-26841080.pdf, ComponentLink10URL=https://datasheet.ciiva.com/26841/ft232rl-reel-26841080.pdf, Data Rate=12Mbps, DatasheetVersion="ver 2.07, Jul-2010", Height=1.75mm, Interface=RS-232,RS-422,RS-485,UART, Lead Free="Lead Free", Length=10.2mm, Mount="Surface Mount", Number of Channels=1, Number of Pins=28, Number of Transceivers=1, PackageDescription="28-Pin Small Outline Package 0.65 mm Pitch", PackageReference=SSOP-28, PackageVersion=2010, Packaging="Tape and Reel", Pricing 1="1=4.5, 10=4.05, 100=3.65, 250=3.25, 500=2.85002, 1000=2.65 (USD)", Published=19-Aug-2010, Publisher="Altium Limited", Radiation Hardening=No, REACH SVHC="No SVHC", Stock 1=216496, Supplier 1=Digi-Key, Supplier 2=Digi-Key, Weight=0.080001oz, Width=5.3mm
U5: "SOIC", Supplier Part Number=MCP2515T-I/SOCT-ND, Supplier 1=Digi-Key
U6: "Temp Sensor IR", Manufacturer_Part_Number=OP77FJZ, Built_By=EMA_UL_Team, RefDes=RefDes, Type=DEV, Vendor="Analog Devices Inc"
Y1 Y2: Capacitance=15pF, Case/Package=SMD/SMT, Frequency=16MHz, Frequency Stability=0.15%, Frequency Tolerance=0.5%, Manufacturer=Murata, Manufacturer Part Number=CSTCE16M0V53C-R0, Max Operating Temperature=125°C, Min Operating Temperature=-40°C, Package Quantity=3000, Supplier Part Number=490-17948-1-ND, ComponentLink1Description=https://datasheet.ciiva.com/16430/cstce16m0v53c-r0-16430704.pdf, ComponentLink1URL=https://datasheet.ciiva.com/16430/cstce16m0v53c-r0-16430704.pdf, ComponentLink2Description=https://datasheet.ciiva.com/14132/ceralock-eng-bro-14132709.pdf, ComponentLink2URL=https://datasheet.ciiva.com/14132/ceralock-eng-bro-14132709.pdf, ComponentLink3Description=https://datasheet.ciiva.com/29617/l0430e-29617948.pdf, ComponentLink3URL=https://datasheet.ciiva.com/29617/l0430e-29617948.pdf, ComponentLink4Description=https://datasheet.ciiva.com/29617/l0430e-29617949.pdf, ComponentLink4URL=https://datasheet.ciiva.com/29617/l0430e-29617949.pdf, ComponentLink5Description=https://datasheet.ciiva.com/29617/l0430e-29617950.pdf, ComponentLink5URL=https://datasheet.ciiva.com/29617/l0430e-29617950.pdf, ComponentLink6Description=https://datasheet.ciiva.com/26812/getdatasheetpartid-418508-26812063.pdf, ComponentLink6URL=https://datasheet.ciiva.com/26812/getdatasheetpartid-418508-26812063.pdf, Composition=Ceramic, Contact Plating=Gold, Height=0.031inch, Lead Free="Lead Free", Length=0.126inch, Mount="Surface Mount", Number of Pins=3, Packaging="Tape and Reel", REACH SVHC="No SVHC", Stock 1=0, Supplier 1=Digi-Key, Termination=SMD/SMT, Tolerance=0.5%, Width=0.051inch

## Via types
v1: diameter 0.5, hole 0.3, Top Layer to Bottom Layer, tented both sides, 104 vias
v2: diameter 0.5, hole 0.3, Top Layer to Bottom Layer, 2 vias
v3: diameter 4, hole 4, Top Layer to Bottom Layer, 2 vias

## Nets (pads, with @x,y where several pads share a name; then routed paths per layer and width w, separated by ;. In a path a pad name is that pad's centre, name@x,y a point inside that pad or via, vN(x,y) a via of type N, cw(c..) or ccw(c..) an arc to the next point about the centre after c; other vN are vias at no path point)
+3.3V: C8.1 U4.17 | length 7.2
  Top Layer w0.35: v1(8.636,1.803) 8.636,-0.762 9.394,-1.52 10.821,-1.52 11.284,-1.058 11.382,-1.058 11.514,-0.925 U4.17@12.7,-0.925
+5V: C1.1 C2.1 C6.1 C7.1 C12.2 D2.1 D5.1 D7.1 D8.1 F1.2 P1.4 R1.1 R7.1 R9.2 R10.2 R13.2 R14.2 U1.4 U1.6 U1.18 U3.3 U4.4 U4.20 U5.18 U6.3 | length 158.2
  Top Layer w0.35: U4.4@5.8,4.275 7.117,4.275 v1(7.19,4.349) ; v1(11.024,1.448) 11.396,1.075 12.75,1.075 U4.20 12.809,1.016 v1(14.122,1.016)
  Top Layer w0.5: U1.4@-7.337,-10.338 -4.268,-10.338
  Top Layer w0.55: U1.6 -4.931,-11.938 -2.668,-11.938 ; -4.268,-10.338 -2.668,-11.938 ; U1.18@1.063,-12.738 -1.644,-12.738 v1(-1.756,-12.85) -2.668,-11.938 ; C12.2 3.009,3.135 v1(3.009,3.112)
  Top Layer w1: v1(-9.9,12.8) -8.935,13.765 U3.3 ; U5.18@-6.42,10.23 -4.992,10.23 -4.274,10.949 -3.237,10.949 ; R13.2 -3.237,9.286 -3.237,10.949 ; F1.2 0.29,11.202 ; R14.2 0.613,9.216 0.613,10.879 0.29,11.202 ; v1@9.3,15.02 10.25,15.02 12.07,13.2 D2.1 ; -3.237,10.949 -2.746,11.44 0.051,11.44 0.29,11.202
  Bottom Layer w0.35: 10.922,2.772 11.127,2.977 ; v1(11.024,1.448) 11.125,1.448 11.554,1.877 11.554,2.55 ; v1(14.122,1.016) 16.383,1.016 16.383,0.902 16.891,0.394 16.891,-1.589 D7.1